# EAGLE board dookie (EAGLE 5.06)
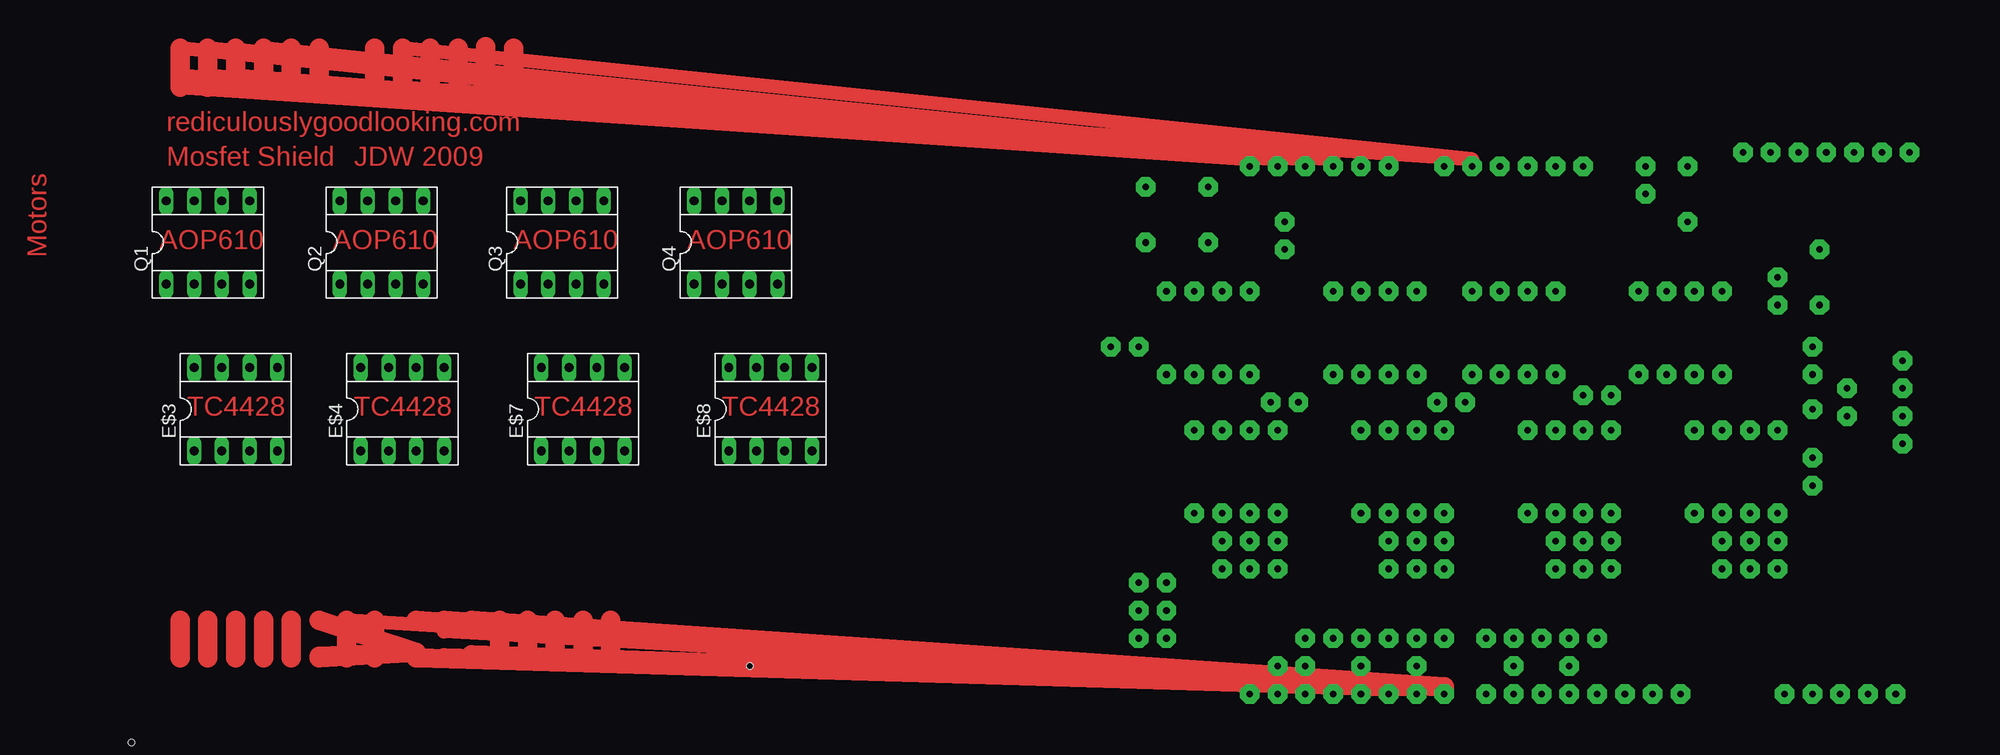
[diagram p0: board, top side]
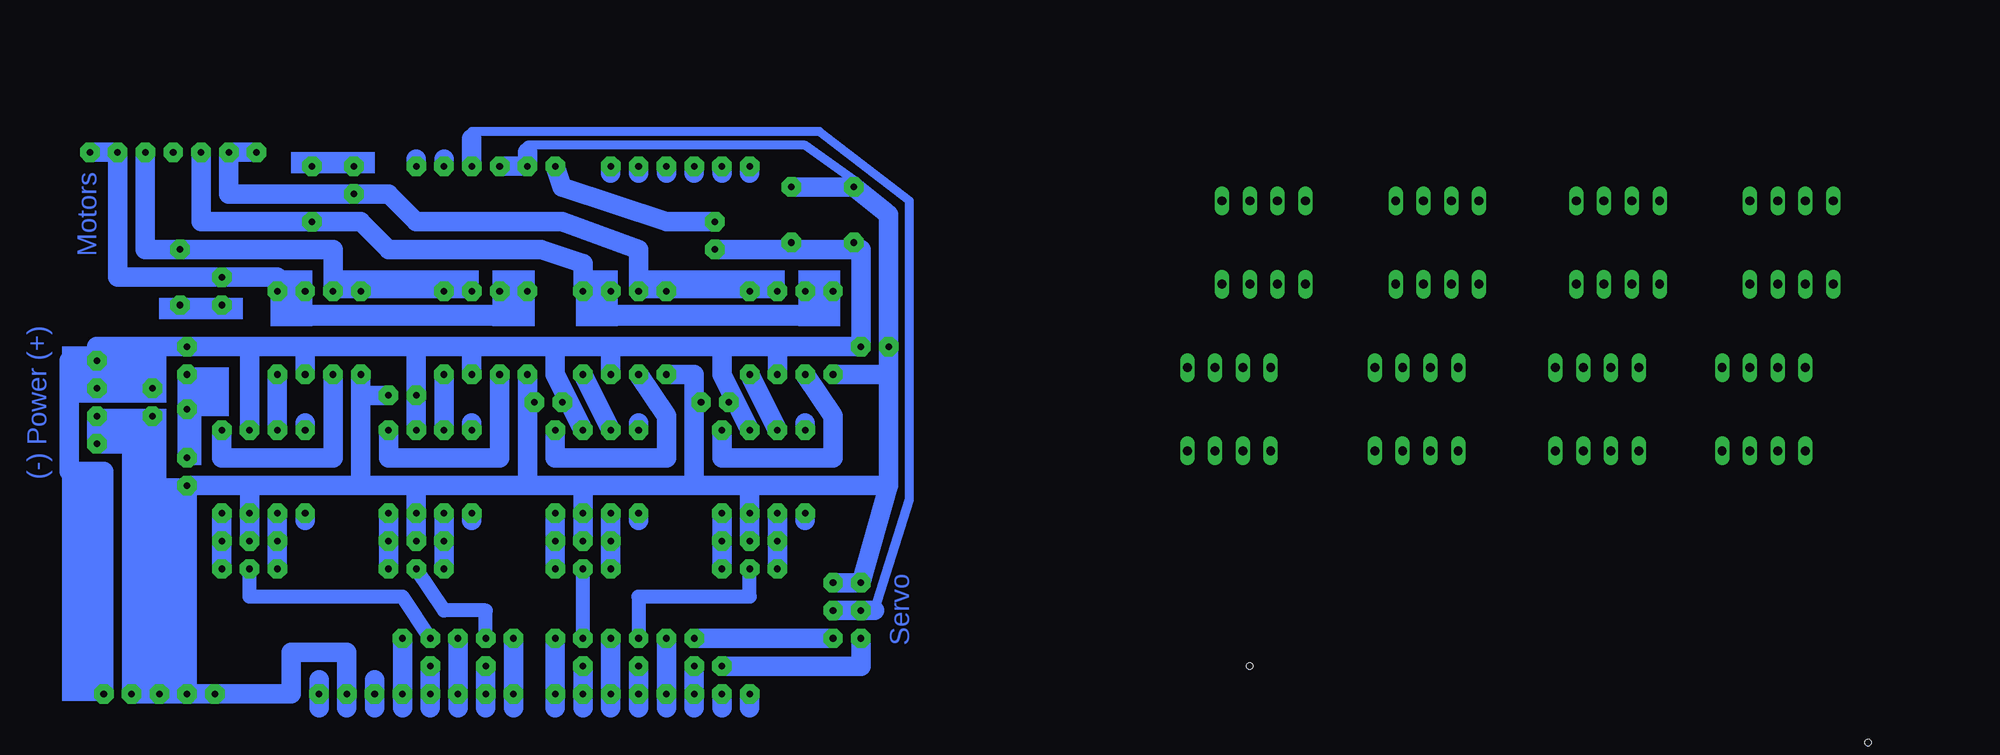
[diagram p1: board, bottom side, seen from below]

No outline drawn. Coordinates in mm, seen from the top.
Copper layers (1*16): Top 0.035mm / dielectric 1.5mm / Bottom 0.035mm
Design rules "default": minimum track width 10mil, minimum drill 24mil, track to track 8mil, track to pad 8mil, pad to pad 8mil, via to via 8mil, smd to smd 8mil, copper to edge 40mil, drill to drill 8mil, minimum pad ring 10mil, minimum via ring 8mil, stop-mask expansion 4mil, vias tented up to drill 0mil, thermal gap 10mil
Holes 0.6 mm at -1.91,59.05 5.71,-12.06 62.23,-5.08 66.04,57.15 -36.2,-14.61

## Footprints (pad centres in the part's own frame; a part is rotated, then mirrored left to right if it is on the bottom)
SOCKET-08 = drill 0.813 long: 1 -3.81,-3.81; 2 -1.27,-3.81; 3 1.27,-3.81; 4 3.81,-3.81; 5 3.81,3.81; 6 1.27,3.81; 7 -1.27,3.81; 8 -3.81,3.81

## Placement (x,y rotation side)
E$3  TC4427  [SOCKET-08]  15.24,18.41 0 top
E$4  TC4427  [SOCKET-08]  30.48,18.41 0 top
E$7  TC4427  [SOCKET-08]  46.99,18.41 0 top
E$8  TC4427  [SOCKET-08]  64.14,18.41 0 top
Q1  AOP610  [SOCKET-08]  12.7,33.66 0 top
Q2  AOP610  [SOCKET-08]  28.57,33.66 0 top
Q3  AOP610  [SOCKET-08]  45.09,33.66 0 top
Q4  AOP610  [SOCKET-08]  60.96,33.66 0 top

## Library data of the parts
E$3 E$4 E$7 E$8 Q1-Q4 = ic-package

## Tracks (layer width: path | path; a pad name or v marks a point on that pad's centre or on a via)
5V  (via drill 0.6 pad 1.78)
  Bottom 0.813: 96.52,0 93.34,10.16 93.34,37.47 101.6,43.81 133.35,43.81 133.35,43.18
  Bottom 1.778: 96.52,0 v100.33,0 | 133.35,43.18 v133.35,40.64
GND  (via drill 0.6 pad 1.78)
  Bottom 0.813: 95.25,36.2 95.25,36.83 98.42,39.37 102.87,42.55 128.27,42.55 v128.27,40.64
  Bottom 1.778: v159.38,-7.62 v161.93,-7.62 v164.47,-7.62 164.47,15.24 v167.64,15.24 v167.64,17.78 | v159.38,-7.62 v156.84,-7.62 149.86,-7.62 149.86,-3.81 144.78,-3.81 v144.78,-7.62 144.78,-8.89 | v153.67,6.35 v153.67,8.89 153.67,11.43 | 153.67,11.43 v159.38,11.43 v159.38,-7.62 | v138.43,6.35 v138.43,8.89 138.43,11.43 | 143.51,11.43 153.67,11.43 | 143.51,11.43 143.51,19.68 | 143.51,19.68 v143.51,21.59 | 138.43,11.43 143.51,11.43 | v123.19,6.35 v123.19,8.89 123.19,11.43 | 128.27,11.43 138.43,11.43 | 128.27,11.43 v128.27,21.59 | 123.19,11.43 128.27,11.43 | v107.95,6.35 v107.95,8.89 107.95,11.43 | 113.03,11.43 123.19,11.43 | 113.03,11.43 113.03,21.59 v115.57,21.59 | 107.95,11.43 113.03,11.43 | 95.25,11.43 v97.79,2.54 v100.33,2.54 | v130.81,40.64 v128.27,40.64 128.27,41.91 | 95.25,11.43 95.25,21.59 | 95.25,11.43 107.95,11.43 | 96.52,21.59 v100.33,21.59 95.25,21.59 | 95.25,21.59 v95.25,24.13 95.25,36.2 v98.42,38.73 v104.14,38.73 | v140.97,19.68 143.51,19.68
S$1  (via drill 0.6 pad 1.78)
  Bottom 0.813: v135.89,8.89 v135.89,6.35
  Bottom 1.778: v135.89,3.81 v135.89,8.89
S$2  (via drill 0.6 pad 1.78)
  Bottom 1.778: v107.95,-7.62 107.95,-8.89
S$3  (via drill 0.6 pad 1.78)
  Bottom 1.27: v107.95,3.81 107.95,1.27 118.11,1.27 v118.11,-2.54
S$4  (via drill 0.6 pad 1.78)
  Bottom 1.778: v132.08,-5.08 132.08,-6.99
S$5
  Bottom 1.778: 142.24,-8.89 142.24,-6.35
S$6  (via drill 0.6 pad 1.78)
  other vias: 140.97,6.35
S$7
  Bottom 1.778: 147.32,-8.89 147.32,-6.35
S$8  (via drill 0.6 pad 1.78)
  Bottom 1.778: v118.11,-5.08 118.11,-6.99
S$9  (via drill 0.6 pad 1.78)
  Bottom 1.27: v148.59,29.21 148.59,26.67 130.81,26.67 v130.81,29.21 | v130.81,29.21 v128.27,29.21 v130.81,29.21
  Bottom 1.778: v168.28,41.91 v165.74,41.91 165.74,30.48 v156.21,30.48 151.13,30.48 v151.13,29.21 v148.59,29.21
S$10  (via drill 0.6 pad 1.78)
  Bottom 1.778: v137.16,-5.08 137.16,-6.99
S$11  (via drill 0.6 pad 1.78)
  Bottom 1.27: v133.35,29.21 v146.05,29.21
  Bottom 1.778: v163.19,41.91 163.19,33.02 v160.02,33.02 146.05,33.02 v146.05,29.21
S$12  (via drill 0.6 pad 1.78)
  Bottom 1.778: v110.49,-7.62 110.49,-8.89
S$13  (via drill 0.6 pad 1.78)
  Bottom 1.778: 168.91,22.86 170.18,22.86 170.18,12.7 167,12.7 v167,-7.62
S$14  (via drill 0.6 pad 1.78)
  other vias: 138.43,19.68
S$15  (via drill 0.6 pad 1.78)
  Bottom 0.406: v110.49,3.81 v110.49,6.35
  Bottom 1.27: v110.49,3.81 v110.49,6.35
  Bottom 1.778: v110.49,3.81 v110.49,8.89
S$16  (via drill 0.6 pad 1.78)
  other vias: 162.56,20.32
S$17  (via drill 0.6 pad 1.78)
  other vias: 98.42,33.66
S$18  (via drill 0.6 pad 1.78)
  Bottom 1.778: v97.79,-2.54 97.79,-5.08 v110.49,-5.08
S$19  (via drill 0.6 pad 1.78)
  other vias: 97.79,0
S$20  (via drill 0.6 pad 1.78)
  other vias: 104.14,33.66
S$21  (via drill 0.6 pad 1.78)
  other vias: 160.66,41.91
S$22  (via drill 0.6 pad 1.78)
  other vias: 125.09,19.05
S$23  (via drill 0.6 pad 1.78)
  other vias: 107.95,29.21
S$24  (via drill 0.6 pad 1.78)
  Bottom 1.778: v105.41,16.51 v107.95,21.59
S$25  (via drill 0.6 pad 1.78)
  Bottom 1.778: v135.89,40.64 135.89,41.27
S$26  (via drill 0.6 pad 1.78)
  Bottom 1.778: v138.43,40.64 138.43,41.27
S$27
  Top 1.27: 107.95,41.27 10.16,48.9 | 107.95,41.27 10.16,51.44 | 107.95,41.27 10.16,47.88 10.16,47.62
  Top 1.778: 10.16,47.88 10.16,51.44
S$28  (via drill 0.6 pad 1.78)
  other vias: 115.57,29.21
S$29  (via drill 0.6 pad 1.78)
  Bottom 1.778: 120.65,40.01 v120.65,40.64
S$30  (via drill 0.6 pad 1.78)
  Bottom 1.778: 120.65,-6.99 v120.65,-2.54
S$31  (via drill 0.6 pad 1.78)
  Bottom 1.778: 118.11,40.01 v118.11,40.64
S$32  (via drill 0.6 pad 1.78)
  Bottom 1.27: v138.43,3.81 135.89,0 132.08,0 v132.08,-2.54
S$33  (via drill 0.6 pad 1.78)
  other vias: 127.64,19.05
S$34  (via drill 0.6 pad 1.78)
  Bottom 1.778: 115.57,40.01 v115.57,40.64
S$35  (via drill 0.6 pad 1.78)
  Bottom 1.778: v100.33,-2.54 v113.03,-2.54
S$36  (via drill 0.6 pad 1.78)
  Bottom 1.778: v123.19,-5.08 123.19,-6.99
S$37  (via drill 0.6 pad 1.78)
  Bottom 1.778: 113.03,40.01 v113.03,40.64
S$38  (via drill 0.6 pad 1.78)
  Bottom 1.778: v159.38,21.59 v159.38,18.41 v159.38,13.97
S$39  (via drill 0.6 pad 1.78)
  Bottom 1.778: 110.49,40.01 v110.49,40.64
S$40  (via drill 0.6 pad 1.78)
  Bottom 1.778: 107.95,40.01 v107.95,40.64
S$41  (via drill 0.6 pad 1.78)
  Bottom 1.778: v113.03,-5.08 v113.03,-7.62 113.03,-8.89
S$42  (via drill 0.6 pad 1.78)
  Bottom 1.778: v115.57,-2.54 v115.57,-7.62 115.57,-8.89
S$43  (via drill 0.6 pad 1.78)
  Bottom 1.778: v118.11,-7.62 118.11,-8.89
S$44  (via drill 0.6 pad 1.78)
  Bottom 1.27: v105.41,29.21 v118.11,29.21
  Bottom 1.778: v118.11,29.21 118.11,33.02 125.09,35.56 138.43,35.56 140.97,38.1 v144.15,38.1 155.57,38.1 v155.57,41.91 v153.03,41.91
S$45  (via drill 0.6 pad 1.78)
  Bottom 1.778: v118.11,21.59 115.57,17.78 115.57,13.97 125.73,13.97 v125.73,16.51
S$46  (via drill 0.6 pad 1.78)
  Bottom 1.778: v120.65,-7.62 120.65,-8.89
S$47  (via drill 0.6 pad 1.78)
  Bottom 1.778: v123.19,-7.62 123.19,-8.89
S$48  (via drill 0.6 pad 1.78)
  Bottom 1.778: v125.73,-7.62 125.73,-8.89
S$49  (via drill 0.6 pad 1.78)
  Bottom 1.27: v123.19,29.21 v120.65,29.21 120.65,26.67 102.87,26.67 v102.87,29.21 v100.33,29.21
  Bottom 1.778: v123.19,29.21 123.19,31.75 127,33.02 140.97,33.02 143.51,35.56 v147.96,35.56 158.12,35.56 v158.12,41.91
S$50
  Top 1.27: 30.48,51.44 128.27,41.27 30.48,47.88 30.48,47.62
  Top 1.778: 30.48,47.88 30.48,51.44
S$51  (via drill 0.6 pad 1.78)
  other vias: 151.13,6.35
S$52  (via drill 0.6 pad 1.78)
  Bottom 1.778: v129.54,-7.62 129.54,-8.89
S$53  (via drill 0.6 pad 1.78)
  other vias: 109.86,19.05
S$54  (via drill 0.6 pad 1.78)
  Bottom 1.778: v102.87,21.59 100.33,17.78 100.33,13.97 110.49,13.97 v110.49,16.51
S$55
  Top 1.27: 113.03,41.27 15.24,48.9 | 113.03,41.27 15.24,51.31 | 113.03,41.27 15.24,47.88 15.24,47.62
  Top 1.778: 15.24,51.44 15.24,51.31 15.24,47.88
S$56  (via drill 0.6 pad 1.78)
  other vias: 156.21,6.35
S$57  (via drill 0.6 pad 1.78)
  Bottom 1.778: v132.08,-7.62 132.08,-8.89
S$58  (via drill 0.6 pad 1.78)
  other vias: 112.39,19.05
S$59  (via drill 0.6 pad 1.78)
  Bottom 0.61: v137.16,-2.54 137.16,-2.41
  Bottom 1.27: v153.67,3.81 153.67,1.27 139.7,1.27 v137.16,-2.54
S$60
  Top 1.27: 34.29,-4.32 34.29,-4.45 | 25.4,-4.45 25.4,-4.32 25.4,-4.19 | 25.4,-0.64 25.4,-0.89 123.19,-6.99 | 123.19,-6.99 34.29,-1.91 | 25.4,-3.94 123.19,-6.99
  Top 1.778: 34.29,-0.89 123.19,-6.99 34.29,-4.32 | 25.4,-3.94 25.4,-0.89 | 25.4,-3.94 25.4,-4.19 | 25.4,-3.94 25.4,-4.32
S$61  (via drill 0.6 pad 1.78)
  Bottom 1.778: v134.62,-7.62 134.62,-8.89
S$62  (via drill 0.6 pad 1.78)
  other vias: 147.96,40.64
S$63  (via drill 0.6 pad 1.78)
  Bottom 1.778: v137.16,-7.62 137.16,-8.89
S$64
  Top 1.27: 110.49,41.27 12.7,48.9 | 110.49,41.27 12.7,51.44 | 110.49,41.27 12.7,47.88 12.7,47.62
  Top 1.778: 12.7,47.88 12.7,51.44
S$65  (via drill 0.6 pad 1.78)
  Bottom 1.27: v123.19,-2.54 v123.19,3.81
S$66  (via drill 0.6 pad 1.78)
  Bottom 1.778: v139.7,-2.54 v139.7,-7.62 139.7,-8.89
S$67
  Top 1.27: 17.78,51.44 115.57,41.27 17.78,47.88 17.78,47.62
  Top 1.778: 17.78,47.88 17.78,51.44
S$68  (via drill 0.6 pad 1.78)
  other vias: 142.24,-7.62
S$69  (via drill 0.6 pad 1.78)
  other vias: 144.15,40.64
S$70  (via drill 0.6 pad 1.78)
  other vias: 147.32,-7.62
S$71  (via drill 0.6 pad 1.78)
  Bottom 1.778: 125.73,-6.99 v125.73,-2.54
S$72  (via drill 0.6 pad 1.78)
  other vias: 156.21,27.94
S$73  (via drill 0.6 pad 1.78)
  other vias: 160.02,27.94
S$74  (via drill 0.6 pad 1.78)
  other vias: 162.56,17.78
S$96  (via drill 0.6 pad 1.78)
  other vias: 135.89,29.21
S$98  (via drill 0.6 pad 1.78)
  other vias: 143.51,29.21
S$104  (via drill 0.6 pad 1.78)
  Bottom 1.778: v130.81,21.59 130.81,13.97 140.97,13.97 v140.97,16.51
S$108  (via drill 0.6 pad 1.78)
  Bottom 1.778: v146.05,21.59 146.05,13.97 156.21,13.97 v156.21,16.51
S$111
  Top 1.27: 20.32,48.26 20.32,48.9 | 20.32,48.26 20.32,47.88 20.32,47.62 | 20.32,48.26 20.32,51.44
  Top 1.778: 20.32,47.88 20.32,51.44
S$114
  Top 1.27: 22.86,47.88 22.86,47.62
  Top 1.778: 22.86,47.88 22.86,51.44
S$115
  Top 1.27: 27.94,48.26 27.94,48.9 | 27.94,48.26 27.94,47.88 27.94,47.62 | 27.94,48.26 27.94,51.44
  Top 1.778: 27.94,47.88 27.94,51.44
S$116
  Top 1.27: 33.02,48.26 33.02,48.9 | 33.02,48.26 33.02,47.88 33.02,47.62 | 33.02,48.26 33.02,51.44
  Top 1.778: 33.02,47.88 33.02,51.44
S$117
  Top 1.27: 35.56,47.88 35.56,47.62
  Top 1.778: 35.56,47.88 35.56,51.44
S$118
  Top 1.27: 38.1,48.26 38.1,48.9 | 38.1,48.26 38.1,47.88 38.1,47.62 | 38.1,48.26 38.1,51.44
  Top 1.778: 38.1,47.88 38.1,51.56
S$119
  Top 1.27: 40.64,47.88 40.64,47.62
  Top 1.778: 40.64,47.88 40.64,51.44
S$120
  Top 1.27: 10.16,-0.89 10.16,-0.64 | 10.16,-4.32 10.16,-4.45
  Top 1.778: 10.16,-4.32 10.16,-0.89
S$121
  Top 1.27: 12.7,-0.64 12.7,-0.89 12.7,-1.27 | 12.7,-1.27 12.7,-1.91 | 12.7,-1.27 12.7,-4.32 12.7,-4.45
  Top 1.778: 12.7,-4.32 12.7,-0.89
S$122
  Top 1.27: 15.24,-0.89 15.24,-0.64 | 15.24,-4.32 15.24,-4.45
  Top 1.778: 15.24,-4.32 15.24,-0.89
S$123
  Top 1.27: 17.78,-0.89 17.78,-0.64 | 17.78,-4.32 17.78,-4.45
  Top 1.778: 17.78,-4.32 17.78,-0.89
S$124
  Top 1.27: 20.32,-0.89 20.32,-0.64 | 20.32,-4.19 20.32,-4.32 20.32,-4.45
  Top 1.778: 20.32,-3.94 20.32,-0.89 | 20.32,-3.94 20.32,-4.19 | 20.32,-3.94 20.32,-4.32
S$126
  Top 1.27: 27.94,-1.27 27.94,-1.91 | 27.94,-1.27 27.94,-1.02 | 27.94,-0.89 27.94,-0.64 | 27.94,-3.94 27.94,-1.27 | 27.94,-4.32 27.94,-4.45
  Top 1.778: 27.94,-1.02 27.94,-0.89 27.94,-3.94 27.94,-4.32
S$127
  Top 1.27: 31.75,-4.32 31.75,-4.45
  Top 1.778: 31.75,-0.89 120.65,-6.99 31.75,-4.32
S$128  (via drill 0.6 pad 1.78)
  Bottom 1.778: v102.87,16.51 102.87,17.14
S$129
  Top 1.27: 36.83,-4.45 36.83,-4.32 36.83,-4.19 | 125.73,-6.99 36.83,-1.91
  Top 1.778: 36.83,-0.89 125.73,-6.99 36.83,-4.06 | 36.83,-4.06 36.83,-4.19 | 36.83,-4.06 36.83,-4.32
S$130
  Top 1.27: 39.37,-0.89 39.37,-0.64 | 39.37,-4.32 39.37,-4.45
  Top 1.778: 39.37,-4.32 39.37,-0.89
S$131
  Top 1.27: 41.91,-0.89 41.91,-0.64 | 41.91,-1.02 41.91,-4.32 41.91,-4.45
  Top 1.778: 41.91,-1.02 41.91,-0.89 41.91,-4.32
S$132
  Top 1.27: 44.45,-0.89 44.45,-0.64 | 44.45,-4.32 44.45,-4.45
  Top 1.778: 44.45,-4.32 44.45,-0.89
S$133
  Top 1.27: 46.99,-0.89 46.99,-0.64 | 46.99,-4.32 46.99,-4.45
  Top 1.778: 46.99,-4.32 46.99,-0.89
S$134
  Top 1.27: 49.53,-0.89 49.53,-0.64 | 49.53,-4.19 49.53,-1.27 | 49.53,-4.32 49.53,-4.45
  Top 1.778: 49.53,-1.27 49.53,-0.89 49.53,-4.19 49.53,-4.32
S$138  (via drill 0.6 pad 1.78)
  Bottom 1.778: v118.11,16.51 118.11,17.14
S$139  (via drill 0.6 pad 1.78)
  Bottom 1.778: v120.65,16.51 v123.19,21.59
S$142  (via drill 0.6 pad 1.78)
  Bottom 1.778: v102.87,8.89 102.87,8.26
S$143  (via drill 0.6 pad 1.78)
  Bottom 0.813: v105.41,3.81 v105.41,6.35
  Bottom 1.778: v105.41,3.81 v105.41,8.89
S$146  (via drill 0.6 pad 1.78)
  Bottom 1.778: v118.11,8.89 118.11,8.26
S$147  (via drill 0.6 pad 1.78)
  Bottom 0.406: v120.65,3.81 v120.65,6.35
  Bottom 0.813: v120.65,6.35 v120.65,8.89
  Bottom 1.27: v120.65,3.81 v120.65,6.35
  Bottom 1.778: v120.65,3.81 v120.65,8.89
S$149  (via drill 0.6 pad 1.78)
  Bottom 0.406: v125.73,3.81 v125.73,6.35
  Bottom 1.27: v125.73,3.81 v125.73,6.35
  Bottom 1.778: v125.73,3.81 v125.73,8.89
S$150  (via drill 0.6 pad 1.78)
  Bottom 1.778: v133.35,16.51 133.35,17.14
S$151  (via drill 0.6 pad 1.78)
  Bottom 1.778: v135.89,16.51 v135.89,21.59
S$154  (via drill 0.6 pad 1.78)
  Bottom 1.778: v148.59,16.51 148.59,17.14
S$155  (via drill 0.6 pad 1.78)
  Bottom 1.778: v151.13,16.51 v151.13,21.59
S$158  (via drill 0.6 pad 1.78)
  Bottom 1.778: v133.35,8.89 133.35,8.26
S$159  (via drill 0.6 pad 1.78)
  Bottom 1.778: 134.62,-6.99 v134.62,-2.54
S$161  (via drill 0.6 pad 1.78)
  Bottom 1.778: 129.54,-6.99 v129.54,-2.54
S$163  (via drill 0.6 pad 1.78)
  Bottom 1.778: v140.97,3.81 v140.97,8.89
S$164  (via drill 0.6 pad 1.78)
  Bottom 1.778: v148.59,8.89 148.59,8.26
S$165  (via drill 0.6 pad 1.78)
  Bottom 1.778: v151.13,3.81 v151.13,8.89
S$167  (via drill 0.6 pad 1.78)
  Bottom 1.778: v156.21,3.81 v156.21,8.89
S$169
  Top 1.27: 22.86,-0.89 22.86,-0.64 | 22.86,-4.19 22.86,-4.32 22.86,-4.45
  Top 1.778: 31.75,-3.81 22.86,-0.89 | 22.86,-4.19 31.75,-3.81 | 22.86,-4.32 31.75,-3.81
VCC  (via drill 0.6 pad 1.78)
  Bottom 1.778: v167.64,22.86 v167.64,20.32 163.19,20.32 | v167.64,22.86 167.64,24.13 v159.38,24.13 153.67,24.13 | 153.67,24.13 v153.67,16.51 | 148.59,24.13 153.67,24.13 | 148.59,24.13 v148.59,21.59 | 138.43,24.13 148.59,24.13 | 138.43,24.13 v138.43,16.51 | v123.19,16.51 125.73,21.59 125.73,24.13 | 133.35,24.13 138.43,24.13 | 133.35,24.13 v133.35,21.59 | 125.73,24.13 133.35,24.13 | v107.95,16.51 110.49,21.59 110.49,24.13 | 120.65,24.13 125.73,24.13 | 120.65,24.13 v120.65,21.59 | 110.49,24.13 120.65,24.13 | 105.41,24.13 110.49,24.13 | 105.41,24.13 v105.41,21.59 | v111.12,33.02 97.79,33.02 v97.79,24.13 105.41,24.13 | v167.64,22.86 168.28,22.86
VIN  (via drill 0.6 pad 1.78)
  Bottom 1.778: v125.73,40.64 125.09,38.73 115.57,35.56 v111.12,35.56
(copper drawn outside any net)
  shapes: Bottom area x27

## Text on the board
Top: rediculouslygoodlooking.com | Mosfet Shield | JDW 2009 | Motors | AOP610 | AOP610 | AOP610 | AOP610 | TC4428 | TC4428 | TC4428 | TC4428
Bottom: Motors | (-) Power (+) | Servo